# Altium PCB Power_Box_V2.PcbDoc (part 2 of 3)
Units mm, origin at the board's own origin, x right, y up, seen from the top; angles counter-clockwise.
Board outline 100 x 80 mm, 4 copper layers (Top Layer, Mid-Top, Mid-Bottom, Bottom Layer), stack 0.603 mm thick; 240 components, 204 nets, 825 pads, 313 vias.
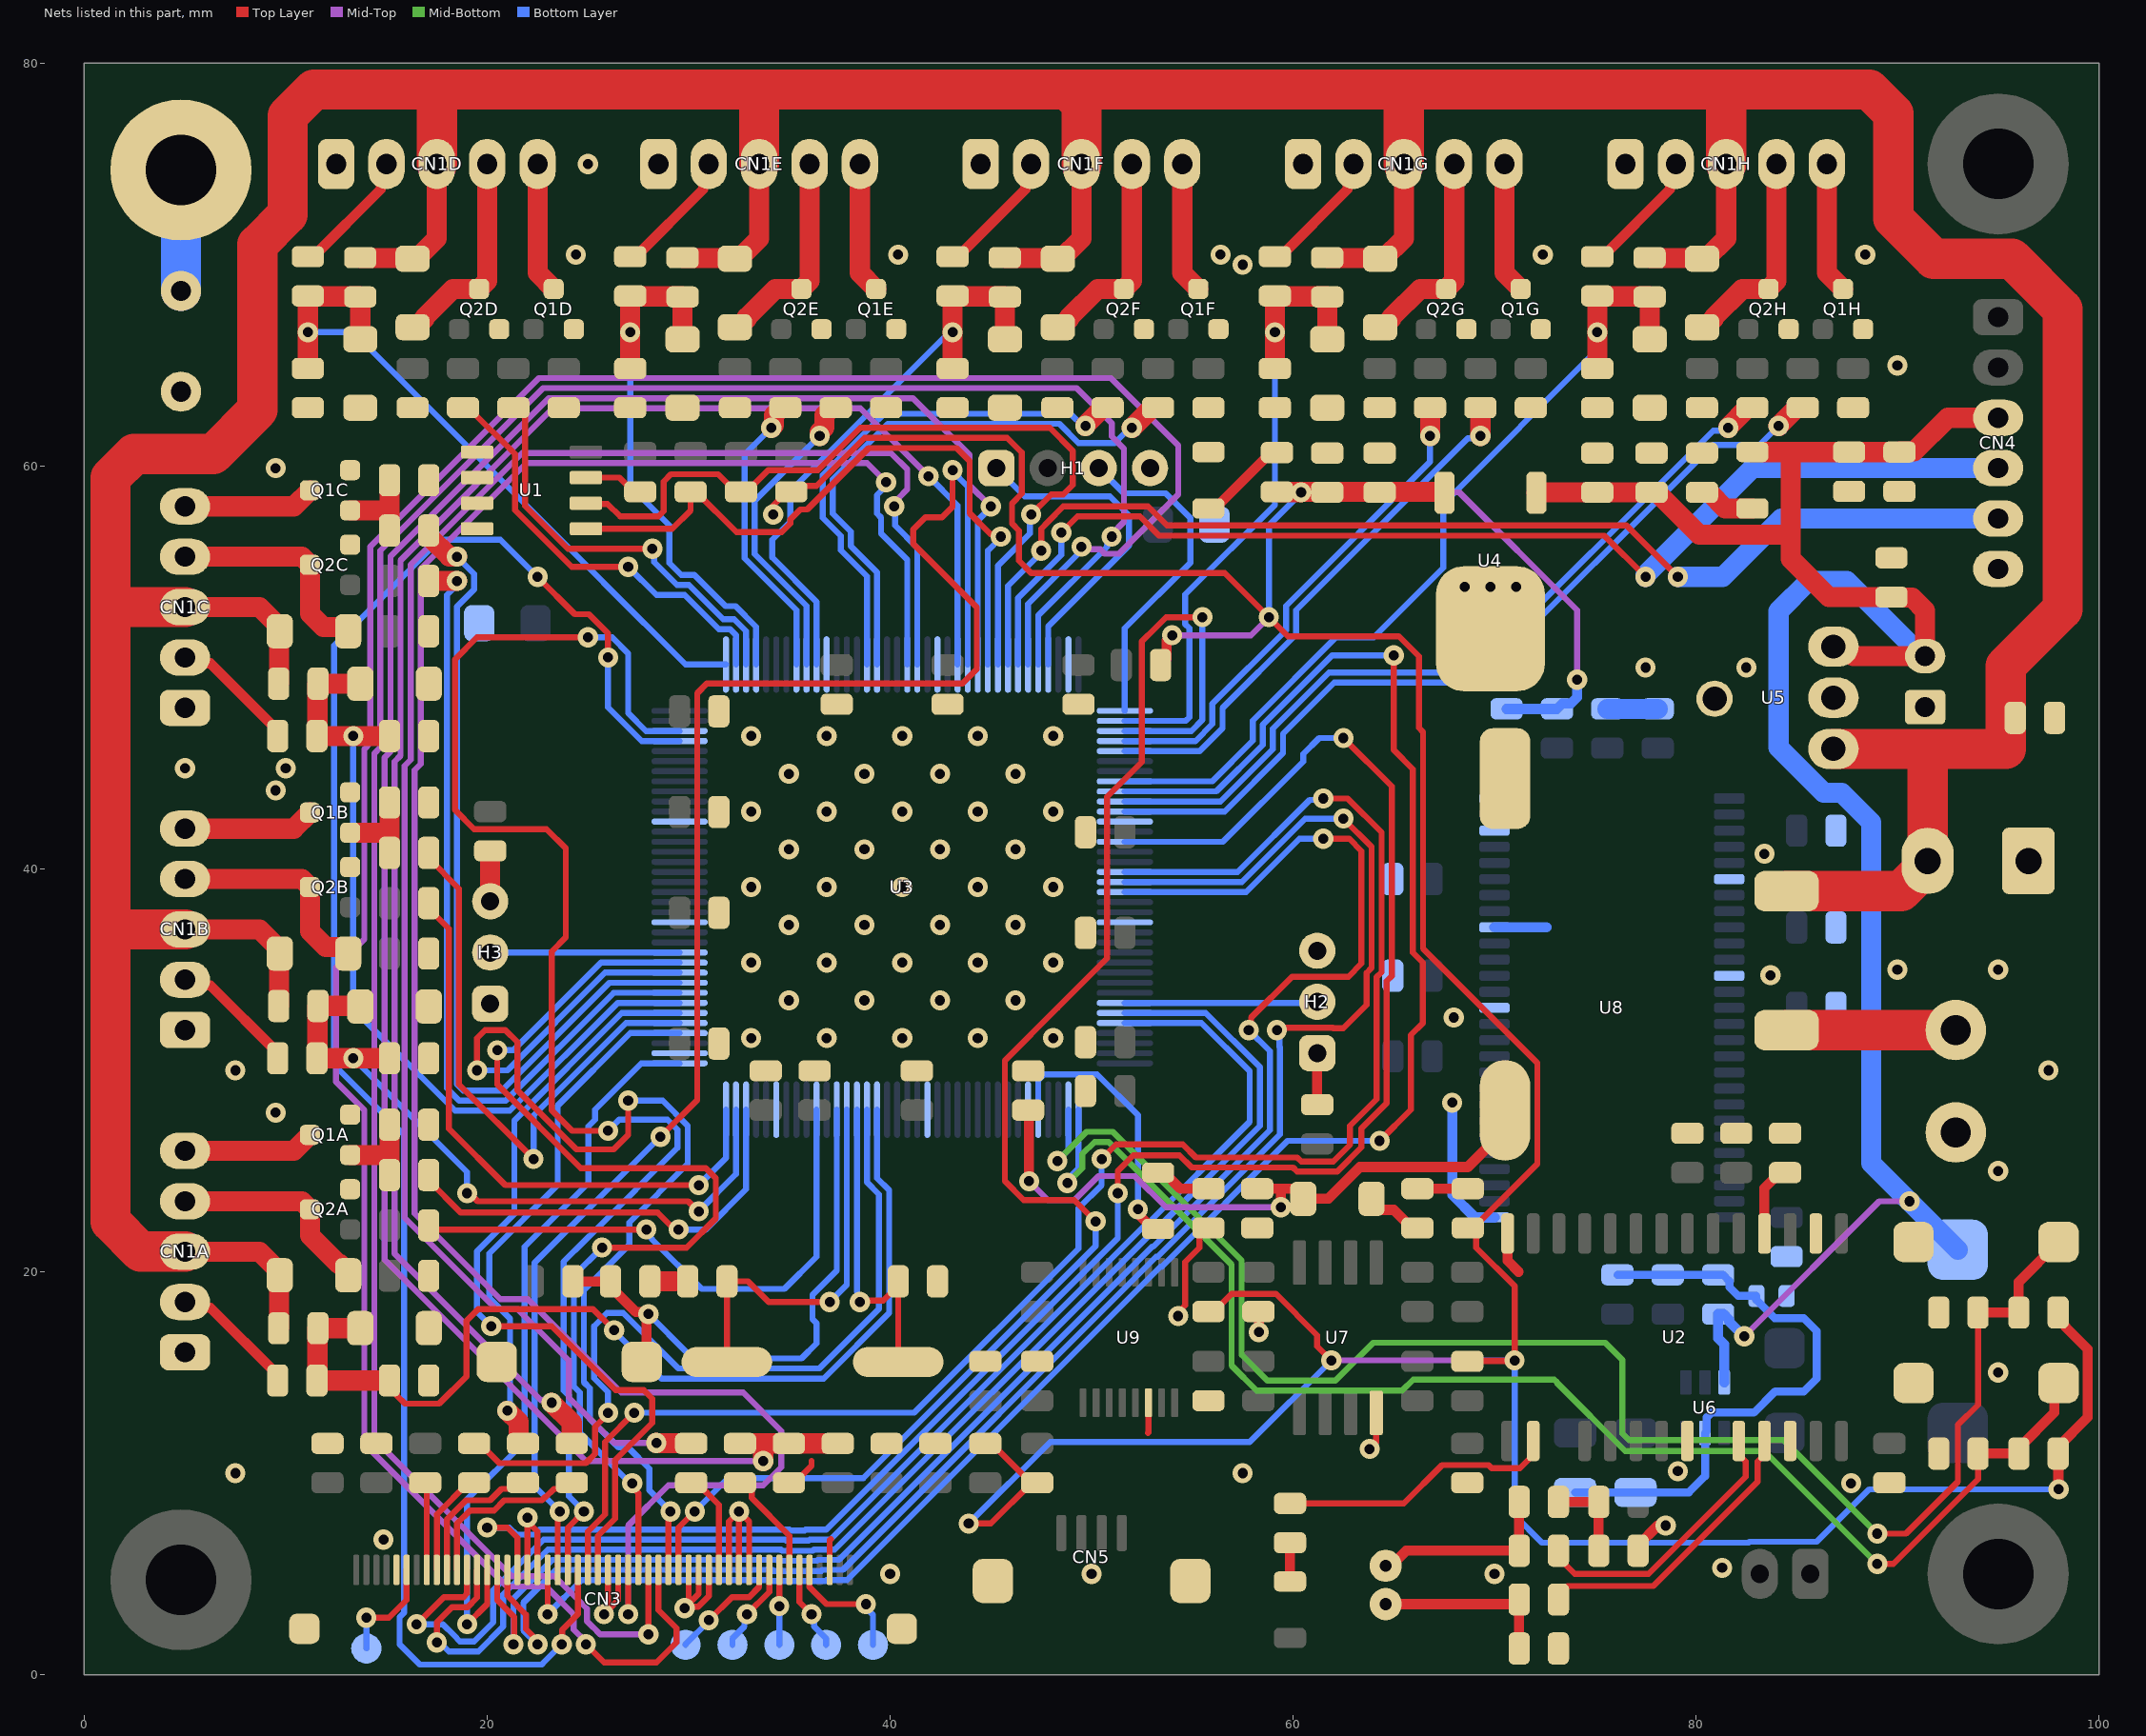
[diagram p4: the nets of this part, all layers, seen from the top]

## Part data
BAT1: library part "BATTERY HOLDER", "BATTERY", Voltage=3V, ComponentLink1Description=Linkedin, ComponentLink1URL=https://ir.linkedin.com/in/mahdi-bagherzade, Phone Number="0915 8700 314", Published Date=9-15-2024, Publisher="Mahdi Bagherzadeh", Size=2016, Type=SMD
C1A C1B C2A C2B C2C C2D C2E C2F C2G C2H C3 C4 C5 C6 C7 C8 C9 C10 C11 C12 C13 C14 C15 C16 C17 C18 C19 C20 C21 C22 C23 C24 C25 C26 C27 C28 C29 C30 C31 C33 C34 C35 C36 C38 C39 C41 C42 C45 C46 C50 C51 C52 C53 C54 C55 C56 C57 C58 C59 C60 C61: library part CAP-CER, "CAPACITOR", Tolerance=X7R, Voltage=50V, ComponentLink1Description=Linkedin, ComponentLink1URL=https://ir.linkedin.com/in/mahdi-bagherzade, Phone Number="0915 8700 314", Published Date=9-15-2024, Publisher="Mahdi Bagherzadeh", Type=SMD
C32 C37: library part CAP-TAN, "CAPACITOR", Power=-, Voltage=16V, ComponentLink1Description=Linkedin, ComponentLink1URL=https://ir.linkedin.com/in/mahdi-bagherzade, Phone Number="0915 8700 314", Published Date=9-15-2024, Publisher="Mahdi Bagherzadeh", Size=A, Tolerance=-
C40: library part CAP-CER, "CAPACITOR", Tolerance=X7R, Voltage=1KV, ComponentLink1Description=Linkedin, ComponentLink1URL=https://ir.linkedin.com/in/mahdi-bagherzade, Phone Number="0915 8700 314", Published Date=9-15-2024, Publisher="Mahdi Bagherzadeh", Type=THD
C43: library part CAP-ELEC, "CAPACITOR", Voltage=25V, ComponentLink1Description=Linkedin, ComponentLink1URL=https://ir.linkedin.com/in/mahdi-bagherzade, Phone Number="0915 8700 314", Published Date=9-15-2024, Publisher="Mahdi Bagherzadeh", Size=10x25, Type=THD
C44: library part CAP-ELEC, "CAPACITOR", Voltage=10V, ComponentLink1Description=Linkedin, ComponentLink1URL=https://ir.linkedin.com/in/mahdi-bagherzade, Phone Number="0915 8700 314", Published Date=9-15-2024, Publisher="Mahdi Bagherzadeh", Size=5x7mm, Type=THD
C47: library part CAP-CER, "CAPACITOR", Tolerance=X7R, Voltage=16V, ComponentLink1Description=Linkedin, ComponentLink1URL=https://ir.linkedin.com/in/mahdi-bagherzade, Phone Number="0915 8700 314", Published Date=9-15-2024, Publisher="Mahdi Bagherzadeh", Type=SMD
C48 C49: library part CAP-CER, "CAPACITOR", Tolerance=X7R, Voltage=25V, ComponentLink1Description=Linkedin, ComponentLink1URL=https://ir.linkedin.com/in/mahdi-bagherzade, Phone Number="0915 8700 314", Published Date=9-15-2024, Publisher="Mahdi Bagherzadeh", Type=SMD
CN1A CN1B CN1C CN1D CN1E CN1F CN1G CN1H: library part CN-5pin, "CONNECTOR", ComponentLink1Description=Linkedin, ComponentLink1URL=https://ir.linkedin.com/in/mahdi-bagherzade, Phone Number="0915 8700 314", Published Date=9-15-2024, Publisher="Mahdi Bagherzadeh", Size=2.54mm, Type=Straight-THD
CN2: library part CN-2pin, "CONNECTOR", ComponentLink1Description=Linkedin, ComponentLink1URL=https://ir.linkedin.com/in/mahdi-bagherzade, Phone Number="0915 8700 314", Published Date=9-15-2024, Publisher="Mahdi Bagherzadeh", Size=2.54mm, Type=Straight-THD
CN3: library part CN-FPC-50pin, "CONNECTOR", ComponentLink1Description=Linkedin, ComponentLink1URL=https://ir.linkedin.com/in/mahdi-bagherzade, Phone Number="0915 8700 314", Published Date=9-15-2024, Publisher="Mahdi Bagherzadeh", Size="?mm-50 Pin", Type=Straight/Right
CN4: library part CN-6pin, "CONNECTOR", ComponentLink1Description=Linkedin, ComponentLink1URL=https://ir.linkedin.com/in/mahdi-bagherzade, Phone Number="0915 8700 314", Published Date=9-15-2024, Publisher="Mahdi Bagherzadeh", Size=2.54mm, Type=Straight-THD
CN5: library part CN-FPC-4pin, "CONNECTOR", ComponentLink1Description=Linkedin, ComponentLink1URL=https://ir.linkedin.com/in/mahdi-bagherzade, Phone Number="0915 8700 314", Published Date=9-15-2024, Publisher="Mahdi Bagherzadeh", Size="?mm-4 Pin", Type=Straight/Right
D1A D1B D1C D1D D1E D1F D1G D1H D2 D3: library part DIODE, "DIODE", ComponentLink1Description=Linkedin, ComponentLink1URL=https://ir.linkedin.com/in/mahdi-bagherzade, Phone Number="0915 8700 314", Published Date=9-15-2024, Publisher="Mahdi Bagherzadeh", Type=SMD
  D1A D1B D1C D1D D1E D1F D1G D1H D2: Code=1N4148
  D3: Code=1N5408
D4: library part DIODE-SCHOTTKY, "DIODE", Code=SS34, ComponentLink1Description=Linkedin, ComponentLink1URL=https://ir.linkedin.com/in/mahdi-bagherzade, Phone Number="0915 8700 314", Published Date=9-15-2024, Publisher="Mahdi Bagherzadeh", Type=SMD
FB1 FB2 FB3 FB5 FB6 FB7 FB8 FB9: library part "FERRITE BEAD", "INDUCATOR", ComponentLink1Description=Linkedin, ComponentLink1URL=https://ir.linkedin.com/in/mahdi-bagherzade, Phone Number="0915 8700 314", Published Date=9-15-2024, Publisher="Mahdi Bagherzadeh", Type=SMD
FB4: "INDUCATOR", ComponentLink1Description=Linkedin, ComponentLink1URL=https://ir.linkedin.com/in/mahdi-bagherzade, Phone Number="0915 8700 314", Published Date=9-15-2024, Publisher="Mahdi Bagherzadeh"
H1: library part HEADER-4pin, "HEADER", ComponentLink1Description=Linkedin, ComponentLink1URL=https://ir.linkedin.com/in/mahdi-bagherzade, Phone Number="0915 8700 314", Published Date=9-15-2024, Publisher="Mahdi Bagherzadeh", Size=2.54mm, Type=Straight-Male
H2 H3: library part HEADER-3pin, "HEADER", ComponentLink1Description=Linkedin, ComponentLink1URL=https://ir.linkedin.com/in/mahdi-bagherzade, Phone Number="0915 8700 314", Published Date=9-15-2024, Publisher="Mahdi Bagherzadeh", Size=2.54mm, Type=Straight/Right-Male/Female
L1: library part INDUCATOR, "INDUCATOR", ComponentLink1Description=Linkedin, ComponentLink1URL=https://ir.linkedin.com/in/mahdi-bagherzade, Phone Number="0915 8700 314", Published Date=9-15-2024, Publisher="Mahdi Bagherzadeh", Size=10x10mm, Type=SMD
LED1 LED3 LED4: library part LED, "LED", Color=GREEN, ComponentLink1Description=Linkedin, ComponentLink1URL=https://ir.linkedin.com/in/mahdi-bagherzade, Phone Number="0915 8700 314", Published Date=9-15-2024, Publisher="Mahdi Bagherzadeh", Size=1206, Type=SMD
LED2: library part LED, "LED", Color=RED, ComponentLink1Description=Linkedin, ComponentLink1URL=https://ir.linkedin.com/in/mahdi-bagherzade, Phone Number="0915 8700 314", Published Date=9-15-2024, Publisher="Mahdi Bagherzadeh", Size=1206, Type=SMD
MIC1: library part MIC, "MIC", ComponentLink1Description=Linkedin, ComponentLink1URL=https://ir.linkedin.com/in/mahdi-bagherzade, Phone Number="0915 8700 314", Published Date=9-15-2024, Publisher="Mahdi Bagherzadeh", Size=2.2mm, Type=THD
Q1A Q1B Q1C Q1D Q1E Q1F Q1G Q1H: library part 2N2222, "TRANSISTOR", Code=1P, ComponentLink1Description=Linkedin, ComponentLink1URL=https://ir.linkedin.com/in/mahdi-bagherzade, Phone Number="0915 8700 314", Published Date=9-15-2024, Publisher="Mahdi Bagherzadeh", Type=SMD
Q2A Q2B Q2C Q2D Q2E Q2F Q2G Q2H: library part S8050, "TRANSISTOR", Code=J3Y, ComponentLink1Description=Linkedin, ComponentLink1URL=https://ir.linkedin.com/in/mahdi-bagherzade, Phone Number="0915 8700 314", Published Date=9-15-2024, Publisher="Mahdi Bagherzadeh", Type=SMD
R1A R1B R2A R2B R2C R2D R2E R2F R2G R2H R3A R3B R3C R3D R3E R3F R3G R3H R4A R4B R4C R4D R4E R4F R4G R4H R5A R5B R5C R5D R5E R5F R5G R5H R6A R6B R6C R6D R6E R6F R6G R6H R7A R7B R7C R7D R7E R7F R7G R7H R8 R9 R10 R11 R12 R13 R14 R15 R16 R17 R18 R43 R44 R45 R46 R47 R48 R49 R50 R51 R52 R53 R54 R55 R56 R57 R58 R59 R60 R61: library part RES, "RESISTOR", Power=1/8W, Tolerance=5%, ComponentLink1Description=Linkedin, ComponentLink1URL=https://ir.linkedin.com/in/mahdi-bagherzade, Phone Number="0915 8700 314", Published Date=9-15-2024, Publisher="Mahdi Bagherzadeh", Type=SMD
S1A S1B S2: library part "PUSH BUTTON", "SWITCH", ComponentLink1Description=Linkedin, ComponentLink1URL=https://ir.linkedin.com/in/mahdi-bagherzade, Phone Number="0915 8700 314", Published Date=9-15-2024, Publisher="Mahdi Bagherzadeh", Size=3x6mm, Type=2Pin-SMD
SC1 SC2 SC3 SC4: library part SCREW, "SCREW", ComponentLink1Description=Linkedin, ComponentLink1URL=https://ir.linkedin.com/in/mahdi-bagherzade, Phone Number="0915 8700 314", Published Date=9-15-2024, Publisher="Mahdi Bagherzadeh", Size=3mm
TP1 TP2 TP3 TP4 TP5 TP6: library part "TEST PIONT", ComponentLink1Description=Linkedin, ComponentLink1URL=https://ir.linkedin.com/in/mahdi-bagherzade, Phone Number="0915 8700 314", Published Date=9-15-2024, Publisher="Mahdi Bagherzadeh"
TR1: library part TEMINAL-2pin, "TERMINAL", Code=KF301-2Pin, ComponentLink1Description=Linkedin, ComponentLink1URL=https://ir.linkedin.com/in/mahdi-bagherzade, Phone Number="0915 8700 314", Published Date=9-15-2024, Publisher="Mahdi Bagherzadeh", Size=5.08mm, Type=Straight
U1: library part AT24C04, "IC", Code=AT24C04, ComponentLink1Description=Linkedin, ComponentLink1URL=https://ir.linkedin.com/in/mahdi-bagherzade, Phone Number="0915 8700 314", Published Date=9-15-2024, Publisher="Mahdi Bagherzadeh", Type=SMD
U2: library part ISD1730, "IC", Code=ISD1730, ComponentLink1Description=Linkedin, ComponentLink1URL=https://ir.linkedin.com/in/mahdi-bagherzade, Phone Number="0915 8700 314", Published Date=9-15-2024, Publisher="Mahdi Bagherzadeh", Type=SMD
U3: "ARM Cortex-M4 32-bit MCU+FPU, 225 DMIPS, 1024 kB Flash, 256 kB Internal RAM, 114 I/Os, 144-pin LQFP, -40 to 85 degC, Tray", I/Os (High Current)=114, Manufacturer=STMicroelectronics, Operating Frequency(F) (Processor speed) (MHz)=180, Supplier Part Number 1=STM32F429ZGT6-ND, Supply Voltage(Vcc) max (V)=3.6, Supply Voltage(Vcc) min (V)=1.8, ComponentLink1Description="Manufacturer URL", ComponentLink1URL=http://www.st.com/web/en/home.html, ComponentLink2Description=Datasheet, ComponentLink2URL=http://www.st.com/st-web-ui/static/active/en/resource/technical/document/data_brief/DM00053488.pdf, ComponentLink3Description="Package Specification", ComponentLink3URL=http://www.st.com/st-web-ui/static/active/en/resource/technical/document/datasheet/DM00037051.pdf, Core="ARM Cortex-M4", D/A Converter=2x12-bit, DatasheetVersion="Rev. 2", FLASH Size (Prog) (kB)=1024, Internal RAM Size (kB)=256, Mounting Technology="Surface Mount", PackageDescription="144-Pin Low Profile Quad Flat Package, 20 x 20 mm Body, 0.5 mm Pitch", PackageReference=LQFP144, PackageVersion="Rev. 4, 06/2013", Packing=Tray, PartNumber=STM32F429ZGT6, Supplier 1=Digi-Key, Supplier 2=Newark, Supplier 3=Mouser, Supplier Part Number 2=06X3675, Supplier Part Number 3=511-STM32F429ZGT6
U4: library part LF33, "REGULATOR", Voltage=3.3V, Code=LF33, ComponentLink1Description=Linkedin, ComponentLink1URL=https://ir.linkedin.com/in/mahdi-bagherzade, Phone Number="0915 8700 314", Published Date=9-15-2024, Publisher="Mahdi Bagherzadeh", Type=SMD
U5: library part 78Mxx, "REGULATOR", Voltage=5V, Code=7805, ComponentLink1Description=Linkedin, ComponentLink1URL=https://ir.linkedin.com/in/mahdi-bagherzade, Phone Number="0915 8700 314", Published Date=9-15-2024, Publisher="Mahdi Bagherzadeh", Type=THD
U6: library part MP3202, "IC", Code=MP3202, Phone Number="0915 8700 314", Published Date=7-2-2026, Publisher="Mahdi Bagherzadeh", Type=SMD
U7: library part W25Qxx, "IC", Code=W25Qxx, ComponentLink1Description=Linkedin, ComponentLink1URL=https://ir.linkedin.com/in/mahdi-bagherzade, Phone Number="0915 8700 314", Published Date=9-15-2024, Publisher="Mahdi Bagherzadeh", Type=SMD
U8: library part IS42S16400J-7TLI, "IC", Code=IS42S16400J-7TLI, ComponentLink1Description=Linkedin, ComponentLink1URL=https://ir.linkedin.com/in/mahdi-bagherzade, Phone Number="0915 8700 314", Published Date=9-15-2024, Publisher="Mahdi Bagherzadeh", Type=SMD
U9: library part XPT2046, "IC", Code=XPT2046, ComponentLink1Description=Linkedin, ComponentLink1URL=https://ir.linkedin.com/in/mahdi-bagherzade, Phone Number="0915 8700 314", Published Date=9-15-2024, Publisher="Mahdi Bagherzadeh", Type=SMD
Y1: library part CRYSTAL, "CRYSTAL", ComponentLink1Description=Linkedin, ComponentLink1URL=https://ir.linkedin.com/in/mahdi-bagherzade, Phone Number="0915 8700 314", Published Date=9-15-2024, Publisher="Mahdi Bagherzadeh", Type=SMD
ZD1A ZD1B ZD1C ZD1D ZD1E ZD1F ZD1G ZD1H: library part DIODE-ZENER, "DIODE", Power=Minimelf, Voltage=3.3V, ComponentLink1Description=Linkedin, ComponentLink1URL=https://ir.linkedin.com/in/mahdi-bagherzade, Phone Number="0915 8700 314", Published Date=9-15-2024, Publisher="Mahdi Bagherzadeh", Type=SMD
NT1: ComponentLink1Description=Linkedin, ComponentLink1URL=https://ir.linkedin.com/in/mahdi-bagherzade, Phone Number="0915 8700 314", Published Date=9-15-2024, Publisher="Mahdi Bagherzadeh"

## Via types
v1: diameter 1, hole 0.5, Top Layer to Bottom Layer, 226 vias
v2: diameter 1, hole 0.5, Top Layer to Bottom Layer, tented top, 87 vias

## Nets (pads, with @x,y where several pads share a name; then routed paths per layer and width w, separated by ;. In a path a pad name is that pad's centre, name@x,y a point inside that pad or via, vN(x,y) a via of type N, cw(c..) or ccw(c..) an arc to the next point about the centre after c; other vN are vias at no path point)
+3V3: C35.2 C36.2 FB1.2 FB2.1 FB3.1 FB4.1 FB5.1 FB6.1 FB7.1 FB8.1 FB9.1 R1A.1 R1B.1 R49.1 U4.3 | length 222.9
  Top Layer w0.3: v2(34.2,57.6) 34.2,58.044 34.881,58.725 FB1.2@35.095,58.725 35.386,59.016 36.345,59.016 38.729,61.4 45.811,61.4 46.53,60.681 46.53,58.632 46.05,58.152 46.05,57.152 46.4,56.802 46.4,55.3 47,54.7 56.6,54.7 59.75,51.55 65.25,51.55 65.35,51.45 65.352,51.45 66.25,50.552 66.25,47.011 66.45,46.811 66.45,36.05 72.125,30.375 72.125,25.35 68.95,22.175 FB5.1@68.726,22.175 ; v2(43.9,7.5) 45,7.5 FB9.1@47.025,9.525 ; FB3.1@44.725,11.475 45.038,11.475 46.988,9.525 FB9.1@47.025,9.525 ; FB9.1@47.3,9.525 FB9.1@47.025,9.525 ; FB6.1@55.802,18.025 56.077,18.025 56.951,18.9 59.152,18.9 61.2,16.852 61.2,16.3 v1(61.9,15.6) ; FB2.1@68.65,15.55 68.675,15.575 70.975,15.575 v2(71,15.6) 71,19.292 69.092,21.2 69.092,21.809 FB5.1@68.726,22.175 ; FB5.1@68.675,22.175 FB5.1@68.726,22.175
  Top Layer w0.5: FB4.1@53.425,50.125 53.731,50.431 53.731,51.331 v2(54,51.6) ; R1B.1@97.975,17.975 97.975,17.64 98.35,17.265 98.35,17.25 99.45,16.15 99.45,12.775 97.975,11.3 R1A.1@97.975,10.975 97.987,10.963 97.987,9.213 v1(98,9.2)
  Top Layer w1: R49.1@59.2,58.725 59.213,58.712 60.388,58.712 v2(60.4,58.7) ; v2@60.375,58.725 67.465,58.725 U4.3@67.515,58.675
  Mid-Top w0.3: v2(54,51.6) 57.9,51.6 v1(58.8,52.5) ; v2(60.4,58.7) 68.25,58.7 74.1,52.85 v1(74.1,49.4) ; v1(61.9,15.6) v2(71,15.6)
  Bottom Layer w0.3: v2(43.9,7.5) 47.95,11.55 57.85,11.55 v1(61.9,15.6) ; v1(58.8,52.5) 58.8,57.068 60.4,58.668 v2(60.4,58.7) ; v2(71,15.6) 71,7.9 72.35,6.55 82.607,6.55 82.657,6.6 86.002,6.6 88.602,9.2 v1(98,9.2)
  Bottom Layer w0.5: FB8.1@70.609,47.941 FB7.1@73.091,47.941 ; FB7.1@73.1,47.95 73.367,48.217 73.799,48.217 74.1,48.518 v1(74.1,49.4)
+5: C33.2 C34.2 C41.1 C42.1 C44.1 C46.1 C47.1 CN4.3 L1.1 LED4.1 U4.1 U5.3 U6.6 | length 108.3
  Top Layer w1: U4.1@72.085,58.675 72.11,58.7 C34.2@75.103,58.7 C33.2@77.795,58.7 78.07,58.7 80.17,56.6 84.7,56.6 ; LED4.1@82.798,60.7 84.7,60.7 ; U5.3@86.825,51.04 87.346,51.04 87.816,50.57 C44.1@91.375,50.57 91.375,52.825 90.725,53.475 89.725,53.475 C46.1@89.7,53.5 86.6,53.5 84.7,55.4 84.7,56.6 ; C41.1@90.1,60.7 90.125,60.725 90.825,60.725 92.5,62.4 CN4.3@95,62.4 ; C41.1@90.314,60.7 C42.1@87.6,60.7 84.7,60.7 ; 84.7,56.6 84.7,60.7
  Mid-Top w0.3: v1(82.4,16.8) 89.1,23.5 v1(90.6,23.5)
  Bottom Layer w0.5: U6.6@81.4,14.51 81.4,16.4 81.1,16.7 C47.1@81.1,17.9 81.368,17.9 81.642,17.626 81.642,17.526 82.368,16.8 v1(82.4,16.8)
  Bottom Layer w1: C44.1@91.375,50.57 91.225,50.57 87.495,54.3 85.6,54.3 84.1,52.8 84.1,46.031 86.347,43.784 87.228,43.784 88.7,42.311 88.7,25.393 L1.1@93,21.093
+12: C43.1 C45.1 CN1A.3 CN1B.3 CN1C.3 CN1D.3 CN1E.3 CN1F.3 CN1G.3 CN1H.3 D1A.2 D1B.2 D1C.2 D1D.2 D1E.2 D1F.2 D1G.2 D1H.2 D3.2 R6A.1 R6B.1 R6C.1 R6D.1 R6E.1 R6F.1 R6G.1 R6H.1 U5.1 | length 295.8
  Top Layer w1: CN1A.3@5,21 8.7,21 9.7,20 9.7,19.8 9.675,19.775 9.675,17.223 R6A.1@9.65,17.198 ; CN1B.3@5,37 8.7,37 9.7,36 D1B.2@9.7,35.8 9.675,35.775 9.675,33.223 R6B.1@9.65,33.198 ; CN1C.3@5,53 8.7,53 9.7,52 D1C.2@9.7,51.8 9.675,51.775 9.675,49.223 R6C.1@9.65,49.198 ; R6D.1@13.698,70.35 13.723,70.325 16.275,70.325 D1D.2@16.3,70.3 16.5,70.3 17.5,71.3 CN1D.3@17.5,75 ; R6E.1@29.699,70.35 29.723,70.325 32.275,70.325 D1E.2@32.3,70.3 32.5,70.3 33.5,71.3 CN1E.3@33.5,75 ; R6F.1@45.698,70.35 45.723,70.325 48.275,70.325 48.3,70.3 48.5,70.3 49.5,71.3 CN1F.3@49.5,75 ; R6G.1@61.698,70.35 61.723,70.325 64.275,70.325 64.3,70.3 64.5,70.3 65.5,71.3 CN1G.3@65.5,75 ; R6H.1@77.698,70.35 77.723,70.325 80.275,70.325 D1H.2@80.3,70.3 80.5,70.3 81.5,71.3 CN1H.3@81.5,75
  Top Layer w2: CN1A.3@5,21 2.8,21 1.3,22.5 1.3,37.1 ; CN1B.3@5,37 1.4,37 1.3,37.1 ; CN1C.3@5,53 1.4,53 1.3,53.1 ; CN1D.3@17.5,75 17.5,78.7 ; CN1E.3@33.5,75 33.5,78.6 33.6,78.7 ; CN1F.3@49.5,75 49.5,78 48.8,78.7 ; CN1G.3@65.5,75 65.5,78.7 ; CN1H.3@81.5,75 81.5,78.7 ; D3.2@84.5,38.9 90.188,38.9 91.5,40.212 C43.1@91.5,40.588 ; U5.1@86.825,45.96 95.375,45.96 ; C43.1@91.5,40.4 91.5,45.76 ; 95.375,46.16 95.375,47.5 95.375,50.075 98.2,52.9 98.2,67.783 95.683,70.3 91.8,70.3 89.8,72.3 89.8,77.5 88.6,78.7 81.5,78.7 ; 1.3,37.1 1.3,53.1 ; 1.3,53.1 1.3,59.428 2.472,60.6 6.4,60.6 8.6,62.8 8.6,71 10.1,72.5 10.1,77.4 11.4,78.7 17.5,78.7 ; 17.5,78.7 33.6,78.7 ; 33.6,78.7 48.8,78.7 ; 48.8,78.7 65.5,78.7 ; 65.5,78.7 81.5,78.7
+12_IN: D3.1 TR1.2 | length 8.4
  Top Layer w2: D3.1@84.5,32 TR1.2@92.9,32
GND: C47.2 C48.2 NT1.1 R53.2 R54.2 R55.2 U6.2 | length 29.7
  Bottom Layer w0.4: R54.2@74,9.05 R55.2@77,9.05 79.65,9.05 80.45,9.85 U6.2@80.45,12 80.54,12.09 80.54,12.771 80.774,13.005 82.88,13.005 83.937,14.062 85.362,14.062 86,14.7 86,17.05 85.35,17.7 83.9,17.7 83,18.6 NT1.1@83,18.8 82.1,18.8 81.661,19.239 81.661,19.53 81.341,19.85 C47.2@81.1,19.85 C48.2@78.6,19.85 R53.2@76.1,19.85
GND_MCU: BAT1.2 C1A.2 C1B.2 C2A.2 C2B.2 C2C.2 C2D.2 C2E.2 C2F.2 C2G.2 C2H.2 C3.2 C4.2 C7.2 C8.2 C9.2 C10.2 C11.1 C12.2 C13.2 C14.2 C15.1 C16.1 C17.1 C18.2 C19.2 C20.2 C21.2 C22.2 C23.2 C24.2 C25.2 C26.2 C27.2 C28.2 C29.2 C30.2 C31.2 C32.2 C33.1 C34.1 C35.1 C36.1 C37.2 C38.1 C39.1 C40.2 C41.2 C42.2 C43.2 C44.2 C45.2 C46.2 C49.2 C50.1 C51.1 C52.1 C53.1 C54.1 C55.1 C56.1 C57.1 C58.1 C59.2 C60.2 C61.2 CN1A.1 CN1B.1 CN1C.1 CN1D.1 CN1E.1 CN1F.1 CN1G.1 CN1H.1 CN3.5 CN3.18 CN3.19 CN3.26 CN3.27 CN3.34 CN3.35 CN3.36 CN3.38 CN3.39 CN3.40 CN3.48 CN3.51 CN3.52 CN4.6 CN5.5 CN5.6 H1.4 H2.3 H3.1 LED2.2 NT1.2 Q1A.1 Q1B.1 Q1C.1 Q1D.1 Q1E.1 Q1F.1 Q1G.1 Q1H.1 Q2A.1 Q2B.1 Q2C.1 Q2D.1 Q2E.1 Q2F.1 Q2G.1 Q2H.1 R3A.2 R3B.2 R3C.2 R3D.2 R3E.2 R3F.2 R3G.2 R3H.2 R5A.1 R5B.1 R5C.1 R5D.1 R5E.1 R5F.1 R5G.1 R5H.1 R13.2 R14.2 R51.2 R52.2 S1A.1 S1B.1 S2.1 TR1.1 U1.1 U1.2 U1.3 U1.4 U1.7 U2.8 U2.12 U2.16 U2.28 U3.16 U3.31 U3.38 U3.51 U3.61 U3.83 U3.94 U3.107 U3.120 U3.130 U4.2 U5.2 U5.4 U7.4 U8.6 U8.12 U8.28 U8.41 U8.46 U8.52 U8.54 U9.6 ZD1A.1 ZD1B.1 ZD1C.1 ZD1D.1 ZD1E.1 ZD1F.1 ZD1G.1 ZD1H.1 | length 59.3
  Top Layer w0.3: CN3.18@22,5.2 v1@22,7.511 ; v1(22,7.8) v1@22,7.511 ; CN3.19@22.5,5.2 22.5,7.111 22.1,7.511 v1@22,7.511 ; U1.7@24.9,59.43 26.557,59.43 27.261,58.725 C3.2@27.597,58.725 ; v1(25.8,3) v1@25.8,3.002 ; CN3.26@26,5.2 26,3.389 25.8,3.189 v1@25.8,3.002 ; CN3.27@26.5,5.2 26.5,3.702 v1@25.8,3.002 ; 29.3,19.525 C17.1@29.95,19.525 ; v1@29.934,3.305 30.002,3.373 30.471,3.373 31,3.902 CN3.36@31,5.2 ; v1@29.934,3.434 30.5,4 CN3.35@30.5,5.2 ; v1@30,3.6 CN3.34@30,5.2 ; CN3.38@32,5.2 32,7.6 v1(32.5,8.1) ; CN3.39@32.5,5.2 v1(32.5,8.1) ; CN3.40@33,5.2 33,7.6 v1(32.5,8.1) ; C11.1@34.975,9.525 35.25,9.525 36.1,10.375 36.1,10.6 ; CN3.48@37,5.2 37,6.675 37.05,6.725 ; 52.8,12 52.825,12.025 U9.6@52.825,13.5 ; v2(54.3,17.8) 54.3,17.976 54.65,18.326 54.65,20.489 55.361,21.2 55.361,21.809 55.727,22.175 R51.2@55.8,22.175 ; C50.1@58.28,18.025 C50.1@58.3,18.004 ; v2(63.8,11.2) 64.132,11.532 U7.4@64.132,12.998
  Top Layer w0.5: v2(58.3,17) C50.1@58.3,18.004 ; U2.28@70.65,21.9 70.65,20.55 71.2,20 ; C4.2@77.125,6.15 77.125,6.418 78.106,7.4 v2(78.5,7.4)
  Top Layer w1: C15.1@28.075,19.525 29.3,19.525
  Bottom Layer w0.5: v1(67.9,28.4) 67.9,23.825 69.031,22.694 69.994,22.694 U8.28@70,22.7 ; U8.46@70,37.1 72.575,37.1
  Bottom Layer w1: C58.1@75.6,47.95 C53.1@78.1,47.95
  other v1: 29.8,3.3 40,5 81.3,5.3 14.85,6.7 87.7,9.5 7.5,10 95,25 7.5,30 33.1,31.6 36.85,31.6 40.6,31.6 44.35,31.6 48.1,31.6 67.975,32.625 34.975,33.475 38.725,33.475 42.475,33.475 46.225,33.475 83.7,34.725 90,35 95,35 33.1,35.35 36.85,35.35 40.6,35.35 44.35,35.35 48.1,35.35 34.975,37.225 38.725,37.225 42.475,37.225 46.225,37.225 33.1,39.1 36.85,39.1 40.6,39.1 44.35,39.1 48.1,39.1 83.4,40.75 34.975,40.975 38.725,40.975 42.475,40.975 46.225,40.975 33.1,42.85 36.85,42.85 40.6,42.85 44.35,42.85 48.1,42.85 9.5,43.9 34.975,44.725 38.725,44.725 42.475,44.725 46.225,44.725 5,45 10,45 33.1,46.6 36.85,46.6 40.6,46.6 44.35,46.6 48.1,46.6 77.5,50 82.5,50 68.525,54 69.8,54 71.075,54 90,65 25,75
  other v2: 50,5 70,5 57.5,10 79.1,10.1 95,15 9.5,27.9 97.5,30 9.5,59.9 57.5,70 24.4,70.5 40.4,70.5 56.4,70.5 72.4,70.5 88.4,70.5
ISD_LED: R10.2 U2.2 | length 13.9
  Top Layer w0.3: R10.2@59.85,8.5 65.5,8.5 67.4,10.4 69.705,10.4 69.855,10.25 71.263,10.25 71.925,10.913 U2.2@71.925,11.6
ISD_MIC_N: C6.2 U2.11 | length 14.6
  Top Layer w0.3: C6.2@73.175,3.725 73.175,3.939 73.636,4.4 77.889,4.4 83.062,9.573 83.062,10.574 83.4,10.912 U2.11@83.4,11.6
ISD_MIC_P: C5.2 U2.10 | length 13.9
  Top Layer w0.3: C5.2@73.175,6.15 73.175,5.814 73.989,5 77.641,5 82.462,9.822 82.462,10.574 82.125,10.912 U2.10@82.125,11.6
LTDC_B2: CN3.17 U3.122 | length 92.6
  Top Layer w0.3: v2(20,7.3) 20.998,7.3 21.5,6.798 CN3.17@21.5,5.2 ; v2(51.3,23.9) 51.3,24.999 52.076,25.775 54.368,25.775 54.968,25.175 60.002,25.175 60.202,24.975 62.198,24.975 63.4,26.177 63.4,27.118 64.65,28.368 64.65,34.429 64.9,34.679 64.9,44.1 v1(62.5,46.5)
  Bottom Layer w0.3: v2(20,7.3) 21.096,7.3 21.446,6.95 22.352,6.95 22.602,7.2 34.998,7.2 35.048,7.15 35.752,7.15 35.802,7.2 36.83,7.2 51.3,21.67 v2(51.3,23.9) ; U3.122@51.65,41.35 56.521,41.35 60.5,45.329 60.5,45.702 61.298,46.5 v1(62.5,46.5)
LTDC_B3: CN3.16 U3.126 | length 86.2
  Top Layer w0.3: CN3.16@21,5.2 21,3.909 21.933,2.976 21.933,2.256 22.5,1.689 v2(22.5,1.5) ; v1(59.2,32) 59.31,32.11 61.981,32.11 61.991,32.1 62.5,32.1 63.65,33.25 63.65,34.843 63.9,35.093 63.9,41.1 v1(62.5,42.5)
  Bottom Layer w0.3: v2(22.5,1.5) v2(22.5,1.5) 21.8,2.202 21.8,3.57 23.43,5.2 34.17,5.2 34.22,5.15 36.58,5.15 36.63,5.2 37.659,5.2 53.209,20.75 53.273,20.75 59.35,26.827 59.35,31.157 59.334,31.173 59.334,31.866 v1(59.2,32) ; U3.126@51.65,39.35 57.457,39.35 60.607,42.5 v1(62.5,42.5)
LTDC_B4: CN3.15 U3.127 | length 84.9
  Top Layer w0.3: CN3.15@20.5,5.2 20.5,3.702 21.343,2.859 21.343,1.543 v1(21.3,1.5) ; v1(57.8,32) 57.922,32.122 57.922,32.622 59.95,34.65 62.75,34.65 63.4,35.3 63.4,40.893 62.793,41.5 v1(61.5,41.5)
  Bottom Layer w0.3: v1(21.3,1.5) 21.3,3.777 23.223,5.7 34.377,5.7 34.427,5.65 36.373,5.65 36.423,5.7 37.452,5.7 53.002,21.25 53.066,21.25 58.85,27.034 58.85,30.95 v1(57.8,32) ; U3.127@51.65,38.85 57.664,38.85 60.314,41.5 v1(61.5,41.5)
LTDC_B5: CN3.14 U3.37 | length 36.4
  Top Layer w0.3: v1(19,2.5) 20,3.5 CN3.14@20,5.2
  Bottom Layer w0.3: v1(19,2.5) 19,8.7 21.85,11.55 21.85,21.243 25.024,24.417 25.024,27.226 25.35,27.552 25.35,28.052 27.648,30.35 U3.37@29.55,30.35
LTDC_B6: CN3.13 U3.139 | length 68.4
  Top Layer w0.3: v2(17.5,1.6) 17.5,2.6 18.25,3.35 19.031,3.35 19.5,3.819 CN3.13@19.5,5.2
  Bottom Layer w0.3: v2(17.5,1.6) 17.644,1.6 18.094,1.15 19.559,1.15 20.8,2.391 20.8,3.984 23.016,6.2 34.584,6.2 34.634,6.15 36.166,6.15 36.216,6.2 37.245,6.2 52.795,21.75 52.859,21.75 58.35,27.241 58.35,30.164 55.664,32.85 U3.139@51.65,32.85
LTDC_B7: CN3.12 U3.140 | length 67.4
  Top Layer w0.3: v1(16.5,2.5) 17.85,3.85 18.824,3.85 19,4.026 CN3.12@19,5.2
  Bottom Layer w0.3: v1(16.5,2.5) 17.802,2.5 18.35,1.952 18.35,1.948 18.648,1.65 19.352,1.65 20.3,2.598 20.3,4.191 22.809,6.7 34.791,6.7 34.841,6.65 35.959,6.65 36.009,6.7 37.037,6.7 52.587,22.25 52.652,22.25 57.85,27.448 57.85,29.957 55.457,32.35 U3.140@51.65,32.35
LTDC_CLK: R43.1 U3.92 | length 90.2
  Top Layer w1: v2(28.4,11.5) 28.412,11.488 30.113,11.488 R43.1@30.125,11.475
  Mid-Top w0.3: v2(28.4,11.5) 26.298,11.5 24.05,13.748 24.05,15.6 21.502,18.148 20.441,18.148 15.9,22.689 15.9,45.12 16.2,45.42 16.2,55.109 21.741,60.65 40.043,60.65 40.85,59.843 40.85,58.852 40.65,58.652 40.65,58.639 40.2,58.189 v1(40.2,58)
  Bottom Layer w0.3: v1(40.2,58) 40.248,57.952 40.248,57.05 41.35,55.948 U3.92@41.35,50.15
LTDC_DE: R16.1 U3.22 | length 40.4
  Top Layer w0.3: R16.1@19.35,11.475 19.625,11.475 20.6,10.5 24.891,10.5 25.35,10.959 25.35,12.306 26,12.956 v1(26,13)
  Bottom Layer w0.3: v1(26,13) 26,14.023 25.3,14.723 25.3,17.302 25.948,17.95 26.748,17.95 29.498,15.2 36.493,15.2 39.45,18.157 39.45,23.843 38.85,24.443 U3.22@38.85,28.05
LTDC_G2: CN3.25 U3.42 | length 40.8
  Top Layer w0.3: v2(20.2,17.3) 23.2,17.3 26.375,14.125 27.775,14.125 28.198,13.702 28.198,12.5 26.35,10.652 26.35,7.741 25.5,6.891 CN3.25@25.5,5.2
  Bottom Layer w0.3: v2(20.2,17.3) 19.5,18 19.5,21.014 21.35,22.864 21.35,27.514 26.686,32.85 U3.42@29.55,32.85
LTDC_G3: CN3.24 U3.125 | length 83.5
  Top Layer w0.3: CN3.24@25,5.2 25,7.098 25.85,7.948 25.85,11.55 v1(27.3,13) ; v1(50.5,25.6) 51.225,26.325 54.525,26.325 55.175,25.675 60.209,25.675 60.409,25.475 61.991,25.475 62.825,26.309 62.825,27.25 64.15,28.575 64.15,34.636 64.4,34.886 64.4,41.802 62.702,43.5 v1(61.5,43.5)
  Bottom Layer w0.3: v1(27.3,13) 41.202,13 49.35,21.148 49.35,23.152 50.5,24.302 v1(50.5,25.6) ; U3.125@51.65,39.85 57.249,39.85 60.828,43.429 61.429,43.429 v1(61.5,43.5)
LTDC_G4: CN3.23 U3.69 | length 89.7
  Top Layer w0.3: v1(22.5,54.5) 24.35,52.65 25.052,52.65 26,51.702 v1(26,50.5) ; v1(23.7,1.5) 23.722,1.522 23.722,2.222 24.5,3 CN3.23@24.5,5.2
  Bottom Layer w0.3: v1(22.5,54.5) 20.65,56.35 17.65,56.35 12.4,51.1 12.4,30.275 15.875,26.8 15.875,3.077 15.65,2.852 15.65,1.5 16.65,0.5 22.7,0.5 22.85,0.65 22.852,0.65 23.7,1.498 v1(23.7,1.5) ; v1(26,50.5) 26,48.029 27.679,46.35 27.7,46.35 U3.69@29.55,46.35
LTDC_G5: CN3.22 U3.70 | length 74.4
  Top Layer w0.3: CN3.22@24,5.2 24,7.298 24.8,8.098 v1(24.8,8.1) ; v1(25,51.5) 19.5,51.5 18.4,50.4 18.4,42.934 19.359,41.975 22.95,41.975 23.9,41.025 23.9,36.6 23.2,35.9 23.2,28.014 24.214,27 v1(26,27)
  Bottom Layer w0.3: v1(24.8,8.1) 24.8,8.102 24.05,8.852 24.05,13.852 23.8,14.102 23.8,20.5 24.85,21.55 24.85,21.552 25.348,22.05 25.35,22.05 29.45,26.15 29.45,27.052 28.952,27.55 26.55,27.55 v1(26,27) ; v1(25,51.5) 26.202,51.5 27,50.702 27,47.736 27.886,46.85 U3.70@29.55,46.85
LTDC_G6: CN3.21 U3.97 | length 84.2
  Top Layer w0.3: CN3.21@23.5,5.2 23.5,8 v2(23.6,8.1) ; v1(28.6,26.7) 30.425,28.525 30.425,48.725 30.9,49.2 43.591,49.2 44.3,49.909 44.3,52.998 41.15,56.148 41.15,56.852 41.748,57.45 42.575,57.45 43.1,57.975 v1(43.1,59.8)
  Bottom Layer w0.3: v2(23.6,8.1) 22.35,9.35 22.35,20.45 v1(28.6,26.7) ; v1(43.1,59.8) 43.1,59.744 43.85,58.994 U3.97@43.85,50.15
LTDC_G7: CN3.20 U3.117 | length 95.6
  Top Layer w0.3: v1(23,3) CN3.20@23,5.2 ; v1(64.3,26.5) 65.85,28.05 65.85,31.753 66.44,32.343 66.44,35.353 65.95,35.843 65.95,44.959 65,45.909 v1(65,50.6)
  Bottom Layer w0.3: v1(23,3) 24.7,4.7 33.962,4.7 34.012,4.65 36.788,4.65 36.838,4.7 37.866,4.7 53.416,20.25 53.48,20.25 59.73,26.5 v1(64.3,26.5) ; U3.117@51.65,43.85 54.386,43.85 56.193,43.85 58.5,46.157 58.5,47.164 61.936,50.6 v1(65,50.6)
LTDC_HSYNC: R18.1 U3.96 | length 88.5
  Top Layer w1: v2(23.2,13.5) 24.2,12.5 R18.1@24.2,11.475
  Mid-Top w0.3: v2(23.2,13.5) 23.066,13.634 22.664,13.634 19.35,16.948 15.4,20.898 15.4,45.327 15.7,45.627 15.7,55.316 23.259,62.875 38.525,62.875 v1(41.9,59.5)
  Bottom Layer w0.3: v1(41.9,59.5) 43.35,58.05 U3.96@43.35,50.15
LTDC_R2: CN3.33 U3.111 | length 77.4
  Top Layer w0.3: CN3.33@29.5,5.2 29.5,7.298 30.3,8.098 v1(30.3,8.1) ; v1(50.2,22.5) 49.141,23.559 46.639,23.559 45.7,24.498 45.7,30.491 48.309,33.1 50.775,35.566 50.775,43.582 52.5,45.307 52.5,51.3 53.15,51.95 53.15,51.952 53.648,52.45 53.65,52.45 53.7,52.5 v1(55.5,52.5)
  Bottom Layer w0.3: v1(30.3,8.1) 31.95,9.75 38.673,9.75 50.2,21.277 v1(50.2,22.5) ; U3.111@51.65,46.85 54.95,46.85 55.5,47.4 v1(55.5,52.5)
LTDC_R3: CN3.32 U3.46 | length 56.9
  Top Layer w0.3: v2(19.5,30) 19.5,31.6 19.9,32 20.9,32 21.5,31.4 21.5,29.007 24.432,26.075 26.277,26.075 27,26.798 v1(27,28.5) ; CN3.32@29,5.2 29,8 v1(29.1,8.1)
  Bottom Layer w0.3: v2(19.5,30) 21.007,30 25.857,34.85 U3.46@29.55,34.85 ; v1(27,28.5) 28.709,28.5 29.95,27.259 29.95,25.352 27.05,22.452 27.05,21.348 24.8,19.098 24.8,14.516 25.1,14.216 25.1,12.698 26.523,11.275 27,11.275 28.05,10.225 28.05,9.15 v1(29.1,8.1)
LTDC_R4: CN3.31 U3.103 | length 131.2
  Top Layer w0.3: v2(24.9,1.5) 25.8,0.6 28.4,0.6 29.4,1.6 29.4,2.3 28.5,3.2 CN3.31@28.5,5.2
  Mid-Top w0.3: v2(24.9,1.5) 24.9,1.636 24.296,2.24 24.296,2.996 22.918,4.375 20.975,4.375 13.9,11.45 13.9,28.034 12.5,29.434 12.5,35.109 13.9,36.509 13.9,45.948 14.2,46.248 14.2,56.007 22.568,64.375 50.957,64.375 54.3,61.032 54.3,58.598 51.352,55.65 50.648,55.65 50.432,55.866 49.634,55.866 v1(49.5,56)
  Bottom Layer w0.3: U3.103@46.85,50.15 46.85,53.161 49.5,55.811 v1(49.5,56)
LTDC_R5: CN3.30 U3.104 | length 119.8
  Top Layer w0.3: v1(28,2) CN3.30@28,5.2
  Mid-Top w0.3: v1(28,2) 25.602,2 25.252,2.35 25.248,2.35 24.95,2.648 24.95,3.275 23.35,4.875 21.223,4.875 14.4,11.698 14.4,45.741 14.7,46.041 14.7,55.8 22.775,63.875 49.25,63.875 51,62.125 51,61.475 51.61,60.865 51.61,57.233 51,56.623 v1(51,56.5)
  Bottom Layer w0.3: U3.104@47.35,50.15 47.35,52.58 50.763,55.993 50.763,56.074 51,56.311 v1(51,56.5)
LTDC_R6: CN3.29 U3.47 | length 51.5
  Top Layer w0.3: v2(20.5,31) 20.5,29.3 24.65,25.15 30.852,25.15 31.35,24.652 31.35,22.648 29.902,21.2 v2(25.7,21.2) ; v1(27.2,9.5) 27.2,9.311 27.5,9.011 CN3.29@27.5,5.2
  Bottom Layer w0.3: v2(20.5,31) 21.3,31 25.65,35.35 U3.47@29.55,35.35 ; v2(25.7,21.2) 24.3,19.8 24.3,14.309 24.6,14.009 24.6,12.011 27.111,9.5 v1(27.2,9.5)
LTDC_R7: CN3.28 U3.91 | length 107.5
  Top Layer w0.3: v2(27,3) CN3.28@27,5.2
  Mid-Top w0.3: v2(27,3) 27,7.4 29,9.4 33.702,9.4 34.6,10.298 34.6,12.1 32.7,14 26.657,14 22.009,18.648 20.648,18.648 16.4,22.896 16.4,44.912 16.7,45.212 16.7,54.902 21.948,60.15 38.852,60.15 39.8,59.202 v2(39.8,59.2)
  Bottom Layer w0.3: v2(39.8,59.2) 39.8,59.011 39.35,58.561 39.35,57.648 39.55,57.448 39.55,56.65 40.85,55.35 U3.91@40.85,50.15
LTDC_RST: C11.2 R44.1 R45.1 U3.98 | length 108
  Top Layer w1: R45.1@32.55,11.475 33.7,11.475 ; v2(33.7,10.6) 33.7,11.475 ; C11.2@34.975,11.475 33.7,11.475 ; C11.2@34.975,11.475 R44.1@37.4,11.475
  Mid-Top w0.3: v2(33.7,10.6) 24.898,10.6 14.9,20.598 14.9,45.534 15.2,45.834 15.2,55.523 23.052,63.375 41.132,63.375 43.95,60.557 43.95,59.05 v2(45,58)
  Bottom Layer w0.3: U3.98@44.35,50.15 44.35,57.306 45,57.956 v2(45,58)
LTDC_VSYNC: R17.1 U3.40 | length 26.6
  Top Layer w1: v2(21,13.1) 21.554,12.546 21.554,11.5 21.579,11.475 R17.1@21.775,11.475
  Bottom Layer w0.3: v2(21,13.1) 21.134,13.234 21.134,17.666 20.1,18.7 20.1,20.907 23.5,24.307 23.5,28.25 27.1,31.85 U3.40@29.55,31.85
MCU_BOOT0: H2.2 U3.138 | length 9.6
  Bottom Layer w0.3: U3.138@51.65,33.35 61.15,33.35 H2.2@61.2,33.4
MCU_BOOT1: H3.2 U3.48 | length 9.4
  Bottom Layer w0.3: H3.2@20.15,35.85 U3.48@29.55,35.85
MCU_KEY1: C1A.1 R1A.2 S1A.2 U3.1 | length 71.8
  Top Layer w0.3: v2(89,5.5) 89.796,5.5 94,9.704 C1A.1@94,10.975
  Top Layer w0.5: C1A.1@94,10.975 R1A.2@96.025,10.975 96.025,11.25 97.793,13.018 97.793,14.268 S1A.2@98,14.475
  Mid-Bottom w0.3: v2(48.8,24.409) 49.541,25.15 49.541,25.843 50.148,26.45 50.852,26.45 56.95,20.352 56.95,15.343 58.193,14.1 65.411,14.1 65.961,14.65 72.972,14.65 73.099,14.523 73.099,14.492 76.491,11.1 83.4,11.1 v2(89,5.5)
  Bottom Layer w0.3: v2(48.8,24.409) 48.8,24.599 49.35,25.149 U3.1@49.35,28.05
MCU_KEY2: C1B.1 R1B.2 S1B.2 U3.2 | length 79
  Top Layer w0.3: v1(89,7) 89.001,7.001 90.426,7.001 93,9.575 93,12.4 94,13.4 C1B.1@94,17.975
  Top Layer w0.5: C1B.1@94,17.975 R1B.2@96.025,17.975 96.025,19.5 S1B.2@98,21.475
  Mid-Bottom w0.3: v1(48.3,25.5) 49.75,26.95 51.059,26.95 57.45,20.559 57.45,15.875 58.725,14.6 62.102,14.6 63.977,16.475 75.5,16.475 76.35,15.625 76.35,11.976 76.676,11.65 84.348,11.65 v1(89,7) v1(89,7)
  Bottom Layer w0.3: v1(48.3,25.5) 48.85,26.05 U3.2@48.85,28.05
MCU_LED1: R2A.2 U3.34 | length 21.8
  Top Layer w0.3: R2A.2@17.1,24.8 17.1,24.525 18.675,22.95 28.461,22.95 29.311,22.1 v1(29.5,22.1)
  Bottom Layer w0.3: v1(29.5,22.1) 30.85,22.1 32.85,24.1 U3.34@32.85,28.05
MCU_LED2: R2B.2 U3.41 | length 28.7
  Top Layer w0.3: R2B.2@17.1,40.8 17.1,40.525 18.6,39.025 18.6,29.3 v1(22.3,25.6)
  Bottom Layer w0.3: v1(22.3,25.6) 22.3,27.757 26.893,32.35 U3.41@29.55,32.35
MCU_LED3: R2C.2 U3.45 | length 42.4
  Top Layer w1: R2C.2@17.1,56.8 17.1,56.525 18.125,55.5 v2(18.5,55.5)
  Bottom Layer w0.3: v2(18.5,55.5) 18.502,55.5 19.35,54.652 19.35,53.875 18.5,53.025 18.5,29.314 18.814,29 20.714,29 26.064,34.35 U3.45@29.55,34.35
MCU_LED4: R2D.2 U3.75 | length 20.8
  Top Layer w0.3: R2D.2@21.3,62.9 21.514,62.9 21.881,62.534 21.881,58.019 24,55.9 v1(28.2,55.9)
  Bottom Layer w0.3: v1(28.2,55.9) 28.284,55.816 28.284,55.241 29.425,54.1 30.007,54.1 31.707,52.4 32.264,52.4 32.85,51.814 U3.75@32.85,50.15
MCU_LED5: R2E.2 U3.81 | length 15.6
  Top Layer w1: v1(36.5,61.5) 36.5,61.689 36.736,61.925 36.736,62.534 37.102,62.9 R2E.2@37.3,62.9
  Bottom Layer w0.3: U3.81@35.85,50.15 35.85,53.057 33.275,55.632 33.275,58.275 v1(36.5,61.5)
MCU_LED6: R2F.2 U3.88 | length 28.5
  Top Layer w1: v2(52,61.9) 52.013,61.9 53.013,62.9 R2F.2@53.3,62.9
  Bottom Layer w0.3: U3.88@39.35,50.15 39.35,54.729 38.05,56.029 38.05,56.748 37.15,57.648 37.15,59.352 39.898,62.1 48.398,62.1 49.348,61.15 51.15,61.15 51.9,61.9 v2(52,61.9)
MCU_LED7: R2G.2 U3.113 | length 26.8
  Top Layer w1: v2(69.3,61.5) R2G.2@69.3,62.9
  Bottom Layer w0.3: U3.113@51.65,45.85 55.364,45.85 56.5,46.986 56.5,47.993 60.15,51.643 60.15,52.852 68.677,61.379 69.179,61.379 v2(69.3,61.5)
MCU_LED8: R2H.2 U3.119 | length 42.5
  Top Layer w1: v2(84.1,62) 84.112,62 85.012,62.9 R2H.2@85.3,62.9
  Bottom Layer w0.3: U3.119@51.65,42.85 54.8,42.85 56.607,42.85 59.5,45.743 59.5,46.702 62.048,49.25 69.05,49.25 80.85,61.05 83.15,61.05 v2(84.1,62)
MCU_LOCK1: R4A.1 U3.27 | length 28.6
  Top Layer w0.3: R4A.1@17.1,22.3 17.3,22.1 v1(27.9,22.1)
  Bottom Layer w0.3: v1(27.9,22.1) 27.9,21.911 28.172,21.639 28.172,21.628 30.65,19.15 34.75,19.15 36.35,20.75 U3.27@36.35,28.05
MCU_LOCK2: R4B.1 U3.36 | length 29.5
  Top Layer w0.3: R4B.1@17.1,38.3 17.1,38.025 18.1,37.025 18.1,27.1 20.9,24.3 v1(30.5,24.3)
  Bottom Layer w0.3: v1(30.5,24.3) 31.85,25.65 U3.36@31.85,28.05
MCU_LOCK3: R4C.1 U3.44 | length 40.8
  Top Layer w1: R4C.1@17.1,54.3 v1(18.5,54.3)
  Bottom Layer w0.3: v1(18.5,54.3) 18.5,54.111 18,53.611 18,29.591 18,29.107 18.607,28.5 20.921,28.5 26.271,33.85 U3.44@29.55,33.85
MCU_LOCK4: R4D.1 U3.74 | length 21.3
  Top Layer w0.3: R4D.1@18.8,62.9 19.075,62.9 21.381,60.594 21.381,58.13 21.381,57.812 24.193,55 v1(27,55)
  Bottom Layer w0.3: v1(27,55) 28.4,53.6 29.8,53.6 31.5,51.9 32.057,51.9 32.35,51.607 U3.74@32.35,50.15
MCU_LOCK5: R4E.1 U3.80 | length 14.8
  Top Layer w1: v1(34.1,61.9) 34.234,62.034 34.234,62.534 34.6,62.9 R4E.1@34.8,62.9
  Bottom Layer w0.3: v1(34.1,61.9) 32.775,60.575 32.775,55.425 35.35,52.85 U3.80@35.35,50.15
MCU_LOCK6: R4F.1 U3.87 | length 26.4
  Top Layer w1: v2(49.7,62) 49.7,62.037 50.563,62.9 R4F.1@50.8,62.9
  Bottom Layer w0.3: U3.87@38.85,50.15 38.85,54.522 37.55,55.822 37.55,56.541 36.65,57.441 36.65,59.559 39.091,62 39.691,62.6 48.956,62.6 49.556,62 v2(49.7,62)
MCU_LOCK7: R4G.1 U3.112 | length 24.9
  Top Layer w1: v2(66.8,61.5) R4G.1@66.8,62.9
  Bottom Layer w0.3: U3.112@51.65,46.35 55.157,46.35 56,47.193 56,48.2 59.65,51.85 59.65,53.059 66.8,60.209 v2(66.8,61.5)
MCU_LOCK8: R4H.1 U3.118 | length 39.9
  Top Layer w1: v2(81.6,61.9) 81.6,61.937 82.563,62.9 R4H.1@82.8,62.9
  Bottom Layer w0.3: U3.118@51.65,43.35 54.593,43.35 56.4,43.35 59,45.95 59,46.957 61.793,49.75 68.843,49.75 80.859,61.766 81.466,61.766 v2(81.6,61.9)
MCU_MAGNET1: C2A.1 R6A.2 R7A.2 U3.21 ZD1A.2 | length 50.5
  Top Layer w0.3: R7A.2@11.55,14.6 R7A.2@11.575,14.625 ; R6A.2@11.575,17.173 R6A.2@11.6,17.198 R6A.2@11.602,17.2 ; C2A.1@15.15,14.6 15.15,14.264 15.525,13.889 15.525,13.85 15.925,13.45 17.616,13.45 18.965,14.799 18.965,17.565 19.55,18.15 25.25,18.15 v2(26.3,17.1)
  Top Layer w1: R7A.2@11.55,14.6 C2A.1@15.15,14.6 ; R7A.2@11.575,14.625 R6A.2@11.575,17.173 ; R6A.2@11.602,17.2 ZD1A.2@13.7,17.2
  Bottom Layer w0.3: v2(26.3,17.1) 26.3,17.056 28.656,14.7 36.7,14.7 39.95,17.95 39.95,24.05 39.35,24.65 U3.21@39.35,28.05
MCU_MAGNET2: C2B.1 R6B.2 R7B.2 U3.35 ZD1B.2 | length 35
  Top Layer w0.3: v1(19,23.9) 19.126,23.9 19.526,23.5 29.974,23.5 30.474,23 v1(30.5,23)
  Top Layer w1: ZD1B.2@13.7,33.2 11.602,33.2 R6B.2@11.6,33.198 11.575,33.173 11.575,30.625 R7B.2@11.55,30.6 v2(13.35,30.6) C2B.1@15.15,30.6
  Bottom Layer w0.3: v2(13.35,30.6) 19,24.95 v1(19,23.9) ; v1(30.5,23) 32.35,24.85 U3.35@32.35,28.05
MCU_MAGNET3: C2C.1 R6C.2 R7C.2 U3.43 ZD1C.2 | length 42.4
  Top Layer w1: ZD1C.2@13.7,49.2 11.602,49.2 R6C.2@11.6,49.198 11.575,49.173 11.575,46.625 R7C.2@11.55,46.6 v2(13.35,46.6) C2C.1@15.15,46.6
  Bottom Layer w0.3: v2(13.35,46.6) 13.35,33.05 18.4,28 21.128,28 26.478,33.35 U3.43@29.55,33.35
MCU_MAGNET4: C2D.1 R6D.2 R7D.2 U3.73 ZD1D.2 | length 35.9
  Top Layer w1: C2D.1@11.1,64.85 v2(11.1,66.65) R7D.2@11.1,68.45 11.125,68.425 13.674,68.425 R6D.2@13.698,68.4 13.7,68.398 ZD1D.2@13.7,66.3
  Bottom Layer w0.3: v2(11.1,66.65) 13.35,66.65 25,55 25.788,54.212 25.788,54.21 29.848,50.15 U3.73@31.85,50.15
MCU_MAGNET5: C2E.1 R6E.2 R7E.2 U3.76 ZD1E.2 | length 28.1
  Top Layer w1: C2E.1@27.1,64.85 v2(27.1,66.65) R7E.2@27.1,68.45 27.125,68.425 29.674,68.425 R6E.2@29.699,68.4 29.7,68.398 ZD1E.2@29.7,66.3
  Bottom Layer w0.3: v2(27.1,66.65) 27.1,59 29.05,57.05 29.05,55.182 29.632,54.6 30.284,54.6 31.834,53.05 32.321,53.05 33.35,52.021 U3.76@33.35,50.15
MCU_MAGNET6: C2F.1 R6F.2 R7F.2 U3.82 ZD1F.2 | length 29.5
  Top Layer w1: C2F.1@43.1,64.85 v2(43.1,66.65) R7F.2@43.1,68.45 43.125,68.425 45.674,68.425 R6F.2@45.698,68.4 R6F.2@45.698,68.4 ZD1F.2@45.7,66.3
  Bottom Layer w0.3: U3.82@36.35,50.15 36.35,53.264 34.15,55.464 34.15,56.348 35.05,57.248 35.05,57.352 35.05,58.75 42.95,66.65 v2(43.1,66.65)
MCU_MAGNET7: C2G.1 R6G.2 R7G.2 U3.110 ZD1G.2 | length 32.6
  Top Layer w1: C2G.1@59.1,64.85 v2(59.1,66.65) R7G.2@59.1,68.45 59.125,68.425 61.673,68.425 R6G.2@61.698,68.4 R6G.2@61.698,68.4 ZD1G.2@61.7,66.3
  Bottom Layer w0.3: U3.110@51.65,47.35 54.674,47.35 54.85,47.526 54.85,51.952 54.65,52.152 54.65,53.625 59.1,58.075 v2(59.1,66.65)
MCU_MAGNET8: C2H.1 R6H.2 R7H.2 U3.116 ZD1H.2 | length 44
  Top Layer w1: C2H.1@75.1,64.85 v2(75.1,66.65) R7H.2@75.1,68.45 75.125,68.425 77.673,68.425 R6H.2@77.698,68.4 77.7,68.398 ZD1H.2@77.7,66.3
  Bottom Layer w0.3: U3.116@51.65,44.35 54.179,44.35 55.986,44.35 58,46.364 58,47.372 62.128,51.5 64,51.5 67.45,54.95 67.45,58.125 75.1,65.775 v2(75.1,66.65)
MCU_NRST: C15.2 R46.1 S2.2 U3.25 | length 28.8
  Top Layer w0.5: R46.1@24.25,19.525 C15.2@26.125,19.525 26.125,19.25 27.379,17.996 27.904,17.996 v1(28,17.9) 27.904,17.804 27.904,15.754 S2.2@27.675,15.525
  Bottom Layer w0.3: v1(28,17.9) 29.998,15.902 30.2,15.7 35.602,15.7 36.35,16.448 36.35,17.45 36.15,17.65 36.15,18.852 37.35,20.052 37.35,23.822 ; 37.35,23.822 U3.25@37.35,28.05
MCU_OCS_N: C16.2 U3.23 Y1.1 | length 15.8
  Top Layer w0.3: v1(38.5,18.5) 38.575,18.575 39.664,18.575 C16.2@40.4,19.311 ; Y1.1@40.4,15.525 C16.2@40.4,19.311 ; C16.2@40.4,19.525 C16.2@40.4,19.311
  Bottom Layer w0.3: U3.23@38.35,28.05 38.35,19.026 38.366,19.01 38.366,18.634 v1(38.5,18.5)
MCU_OCS_P: C17.2 U3.24 Y1.2 | length 19.4
  Top Layer w0.3: Y1.2@31.9,15.525 31.9,19.311 C17.2@31.9,19.525 32.95,19.525 33.975,18.5 v1(37,18.5)
  Bottom Layer w0.3: v1(37,18.5) 37.85,19.35 U3.24@37.85,28.05
MCU_RXD: CN4.4 U3.102 | length 57.8
  Top Layer w0.3: v2(48.5,56.7) 49.3,57.5 52.393,57.5 53.343,56.55 75.45,56.55 v1(77.5,54.5)
  Bottom Layer w0.3: U3.102@46.35,50.15 46.35,53.448 48.5,55.598 v2(48.5,56.7)
  Bottom Layer w1: v1(77.5,54.5) 77.5,54.597 82.803,59.9 CN4.4@95,59.9
MCU_SCL: R8.2 U1.6 U3.100 | length 40.8
  Top Layer w0.3: U1.6@24.9,58.16 24.934,58.126 25.974,58.126 26.6,57.5 28.5,57.5 28.758,57.758 28.758,59.231 29.128,59.6 31.45,59.6 32.325,58.725 R8.2@32.6,58.725 32.875,58.725 33.95,59.8 36.422,59.8 38.522,61.9 47.925,61.9 49.07,60.755 49.07,59.07 48.6,58.6 48,58.6 v2(47,57.6)
  Bottom Layer w0.3: U3.100@45.35,50.15 45.35,55.055 46.945,56.65 46.945,57.545 v2(47,57.6)
MCU_SDA: R9.2 U1.5 U3.99 | length 34.5
  Top Layer w0.3: U1.5@24.9,56.89 29.19,56.89 30.097,57.797 R9.2@30.097,58.725 30.372,58.725 32.372,56.725 34.623,56.725 35.05,57.152 35.05,57.352 35.548,57.85 35.886,57.85 38.936,60.9 43.302,60.9 43.95,60.252 43.95,57.657 44.973,56.634 45.366,56.634 v2(45.5,56.5)
  Bottom Layer w0.3: U3.99@44.85,50.15 44.85,55.806 45.5,56.456 v2(45.5,56.5)
MCU_SWCLK: H1.3 U3.109 | length 16.5
  Bottom Layer w0.3: H1.3@50.36,59.9 51.61,58.65 53.675,58.65 54.9,57.425 54.9,55.2 51.65,51.95 U3.109@51.65,47.85
MCU_SWDIO: H1.1 U3.105 | length 16.6
  Bottom Layer w0.3: H1.1@45.28,59.9 46.68,58.5 50.902,58.5 51.85,57.552 51.85,56.05 47.85,52.05 U3.105@47.85,50.15
MCU_TXD: CN4.5 U3.101 | length 58
  Top Layer w0.3: v1(47.5,55.8) 47.5,56.898 47.85,57.248 47.85,57.252 48.598,58 52.8,58 53.75,57.05 76.55,57.05 v1(79.1,54.5)
  Bottom Layer w0.3: U3.101@45.85,50.15 45.85,54.05 47.5,55.7 v1(47.5,55.8)
  Bottom Layer w1: v1(79.1,54.5) 81.325,54.5 84.225,57.4 CN4.5@95,57.4
MCU_VBAT: BAT1.1 C38.2 C39.2 D2.2 U3.6 | length 37
  Top Layer w0.5: C39.2@46.85,28.025 46.9,27.975 v1(46.9,24.5) ; C38.2@58.225,24.125 59.4,24.125 ; v2(59.4,23.2) 59.4,24.125 ; D2.2@60.5,23.625 D2.2@60.5,23.638 ; BAT1.1@70.525,28.012 70.525,27.05 68.675,25.2 63.325,25.2 61.763,23.638 D2.2@60.5,23.638 ; 59.4,24.125 60.013,24.125 D2.2@60.5,23.638
  Mid-Top w0.3: v1(46.9,24.5) 47.841,23.559 49.152,23.559 50.343,24.75 50.852,24.75 52.145,24.75 53.695,23.2 v2(59.4,23.2)
  Bottom Layer w0.3: U3.6@46.85,28.05 46.85,24.55 v1(46.9,24.5)
NetC4_1: C4.1 R11.2 R12.1 | length 4.4
  Top Layer w0.5: R12.1@73.175,8.575 R11.2@75.175,8.575 C4.1@75.175,6.15
NetC5_1: C5.1 MIC1.1 R12.2 | length 9.4
  Top Layer w0.5: MIC1.1@64.6,5.4 64.868,5.4 65.618,6.15 C5.1@71.225,6.15 R12.2@71.225,8.575
NetC6_1: C6.1 MIC1.2 R14.1 | length 9.1
  Top Layer w0.5: MIC1.2@64.6,3.5 71,3.5 C6.1@71.225,3.725 R14.1@71.225,1.3
NetC7_1: C7.1 U2.18 | length 3.6
  Top Layer w0.5: U2.18@83.4,21.9 83.4,24.142 84.183,24.925 C7.1@84.425,24.925
NetC40_1: C40.1 SC2.1 | length 6
  Bottom Layer w2: C40.1@4.8,68.7 SC2.1@4.8,74.7
NetCN1A_2: CN1A.2 R7A.1 | length 6.4
  Top Layer w0.5: CN1A.2@5,18.5 5.287,18.213 6.262,18.213 9.6,14.875 R7A.1@9.6,14.6
NetCN1A_4: CN1A.4 D1A.1 Q2A.3 | length 10.5
  Top Layer w1: CN1A.4@5,23.5 10.8,23.5 Q2A.3@11.2,23.1 11.2,21.806 12.606,20.4 12.659,20.4 13.1,19.959 D1A.1@13.1,19.8
NetCN1A_5: CN1A.5 Q1A.3 | length 6.5
  Top Layer w1: CN1A.5@5,26 10.4,26 Q1A.3@11.2,26.8
NetCN1B_2: CN1B.2 R7B.1 | length 6.4
  Top Layer w0.5: CN1B.2@5,34.5 5.287,34.213 6.262,34.213 9.6,30.875 R7B.1@9.6,30.6
NetCN1B_4: CN1B.4 D1B.1 Q2B.3 | length 11
  Top Layer w1: CN1B.4@5,39.5 10.8,39.5 Q2B.3@11.2,39.1 11.2,36.9 11.985,36.115 12.95,36.115 13.1,35.965 D1B.1@13.1,35.8
NetCN1B_5: CN1B.5 Q1B.3 | length 6.5
  Top Layer w1: CN1B.5@5,42 10.4,42 Q1B.3@11.2,42.8
NetCN1C_2: CN1C.2 R7C.1 | length 6.4
  Top Layer w0.5: CN1C.2@5,50.5 5.287,50.213 6.262,50.213 9.6,46.875 R7C.1@9.6,46.6
NetCN1C_4: CN1C.4 D1C.1 Q2C.3 | length 11.1
  Top Layer w1: CN1C.4@5,55.5 10.8,55.5 Q2C.3@11.2,55.1 11.2,52.675 11.872,52.003 12.95,52.003 13.1,51.853 D1C.1@13.1,51.8
NetCN1C_5: CN1C.5 Q1C.3 | length 6.5
  Top Layer w1: CN1C.5@5,58 10.4,58 Q1C.3@11.2,58.8
NetCN1D_2: CN1D.2 R7D.1 | length 6.4
  Top Layer w0.5: R7D.1@11.1,70.4 11.375,70.4 14.713,73.738 14.713,74.713 CN1D.2@15,75
NetCN1D_4: CN1D.4 D1D.1 Q2D.3 | length 10.5
  Top Layer w1: D1D.1@16.3,66.9 16.459,66.9 16.9,67.341 16.9,67.394 18.306,68.8 Q2D.3@19.6,68.8 20,69.2 CN1D.4@20,75
NetCN1D_5: CN1D.5 Q1D.3 | length 6.5
  Top Layer w1: CN1D.5@22.5,75 22.5,69.6 Q1D.3@23.3,68.8
NetCN1E_2: CN1E.2 R7E.1 | length 6.4
  Top Layer w0.5: R7E.1@27.1,70.4 27.375,70.4 30.713,73.738 30.713,74.713 CN1E.2@31,75
NetCN1E_4: CN1E.4 D1E.1 Q2E.3 | length 10.5
  Top Layer w1: D1E.1@32.3,66.9 32.459,66.9 32.9,67.341 32.9,67.394 34.306,68.8 Q2E.3@35.6,68.8 36,69.2 CN1E.4@36,75
NetCN1E_5: CN1E.5 Q1E.3 | length 6.5
  Top Layer w1: CN1E.5@38.5,75 38.5,69.6 Q1E.3@39.3,68.8
NetCN1F_2: CN1F.2 R7F.1 | length 6.4
  Top Layer w0.5: R7F.1@43.1,70.4 43.375,70.4 46.713,73.738 46.713,74.713 CN1F.2@47,75
NetCN1F_4: CN1F.4 D1F.1 Q2F.3 | length 10.5
  Top Layer w1: D1F.1@48.3,66.9 48.459,66.9 48.9,67.341 48.9,67.394 50.306,68.8 Q2F.3@51.6,68.8 52,69.2 CN1F.4@52,75
NetCN1F_5: CN1F.5 Q1F.3 | length 6.5
  Top Layer w1: CN1F.5@54.5,75 54.5,69.6 Q1F.3@55.3,68.8
NetCN1G_2: CN1G.2 R7G.1 | length 6.4
  Top Layer w0.5: R7G.1@59.1,70.4 59.375,70.4 62.713,73.738 62.713,74.713 CN1G.2@63,75
NetCN1G_4: CN1G.4 D1G.1 Q2G.3 | length 10.5
  Top Layer w1: D1G.1@64.3,66.9 64.459,66.9 64.9,67.341 64.9,67.394 66.306,68.8 Q2G.3@67.6,68.8 68,69.2 CN1G.4@68,75
NetCN1G_5: CN1G.5 Q1G.3 | length 6.5
  Top Layer w1: CN1G.5@70.5,75 70.5,69.6 Q1G.3@71.3,68.8
NetCN1H_2: CN1H.2 R7H.1 | length 6.4
  Top Layer w0.5: R7H.1@75.1,70.4 75.375,70.4 78.713,73.738 78.713,74.713 CN1H.2@79,75
NetCN1H_4: CN1H.4 D1H.1 Q2H.3 | length 10.5
  Top Layer w1: D1H.1@80.3,66.9 80.459,66.9 80.9,67.341 80.9,67.394 82.306,68.8 Q2H.3@83.6,68.8 84,69.2 CN1H.4@84,75
NetCN1H_5: CN1H.5 Q1H.3 | length 6.5
  Top Layer w1: CN1H.5@86.5,75 86.5,69.6 Q1H.3@87.3,68.8
NetCN3_6: CN3.6 TP1.1 | length 5.4
  Top Layer w0.3: v1(14,2.825) 15.124,2.825 16,3.701 CN3.6@16,5.2
  Bottom Layer w0.3: TP1.1@14,1.3 v1(14,2.825)
NetCN3_8: CN3.8 R15.1 | length 4.4
  Top Layer w0.3: R15.1@16.925,9.525 17,9.45 CN3.8@17,5.2
NetCN3_9: CN3.9 R16.2 | length 5.3
  Top Layer w0.3: CN3.9@17.5,5.2 17.5,7.95 19.075,9.525 R16.2@19.35,9.525
NetCN3_10: CN3.10 R17.2 | length 7
  Top Layer w0.3: CN3.10@18,5.2 18,7.707 18.943,8.65 19.978,8.65 20.141,8.65 20.711,9.22 21.469,9.22 R17.2@21.775,9.525
NetCN3_11: CN3.11 R18.2 | length 8.8
  Top Layer w0.3: CN3.11@18.5,5.2 18.5,7.5 19.15,8.15 20.348,8.15 20.848,8.65 22.709,8.65 22.859,8.8 22.9,8.8 23.319,9.219 23.894,9.219 R18.2@24.2,9.525
NetCN3_37: CN3.37 R43.2 | length 5.1
  Top Layer w0.3: R43.2@30.125,9.525 30.4,9.525 31.5,8.425 CN3.37@31.5,5.2
NetCN3_41: CN3.41 TP2.1 | length 5.7
  Top Layer w0.3: v1(31,2.7) 32.15,3.85 33.001,3.85 33.5,4.349 CN3.41@33.5,5.2
  Bottom Layer w0.3: TP2.1@29.85,1.475 29.85,1.512 31,2.662 v1(31,2.7)
NetCN3_42: CN3.42 TP3.1 | length 4.5
  Top Layer w0.3: v1(32.9,3) 32.9,3.002 34,4.102 CN3.42@34,5.2
  Bottom Layer w0.3: TP3.1@32.175,1.475 32.175,1.8 32.766,2.391 32.766,2.866 v1(32.9,3)
NetCN3_43: CN3.43 TP4.1 | length 3.7
  Top Layer w0.3: v1(34.5,3.4) CN3.43@34.5,5.2
  Bottom Layer w0.3: TP4.1@34.5,1.475 v1(34.5,3.4)
NetCN3_44: CN3.44 R45.2 | length 5.5
  Top Layer w0.3: R45.2@32.55,9.525 32.764,9.525 33.131,9.159 33.131,8.769 35,6.9 CN3.44@35,5.2
NetCN3_45: CN3.45 TP5.1 | length 4.3
  Top Layer w0.3: CN3.45@35.5,5.2 35.5,3.6 v1(36.1,3)
  Bottom Layer w0.3: v1(36.1,3) 36.234,2.866 36.234,2.391 36.825,1.8 TP5.1@36.825,1.475
NetCN3_46: CN3.46 TP6.1 | length 6.2
  Top Layer w0.3: CN3.46@36,5.2 36,4.349 36.849,3.5 v1(38.8,3.5)
  Bottom Layer w0.3: v1(38.8,3.5) 38.8,3.311 39.15,2.961 TP6.1@39.15,1.475
NetD2_1: D2.1 R50.1 | length 2.9
  Top Layer w0.5: D2.1@63.9,23.625 63.9,23.561 64.387,23.075 65,23.075 65.9,22.175 R50.1@66.175,22.175
NetFB5_2: FB5.2 R50.2 | length 2.5
  Top Layer w0.5: R50.2@66.175,24.125 FB5.2@68.675,24.125
NetH2_1: H2.1 R48.2 | length 2.6
  Top Layer w0.5: R48.2@61.2,28.3 H2.1@61.2,30.86
NetH3_3: H3.3 R47.2 | length 2.5
  Top Layer w1: H3.3@20.15,38.39 R47.2@20.15,40.9
NetLED1_2: LED1.2 R10.1 | length 1.9
  Top Layer w0.5: LED1.2@59.85,4.625 R10.1@59.85,6.55
NetLED2_1: LED2.1 R49.2 | length 4.5
  Top Layer w0.5: LED2.1@55.802,57.9 56.126,57.9 58.901,60.675 R49.2@59.2,60.675
NetLED3_1: LED3.1 U3.5 | length 13.6
  Top Layer w0.5: v2(52.3,23.1) 52.3,22.879 53.054,22.125 LED3.1@53.3,22.125
  Bottom Layer w0.3: U3.5@47.35,28.05 47.35,29.507 47.643,29.8 50.275,29.8 52.3,27.775 v2(52.3,23.1)
NetLED3_2: LED3.2 R51.1 | length 2.8
  Top Layer w0.5: LED3.2@53.3,24.925 53.6,24.925 54.4,24.125 R51.1@55.8,24.125
NetLED4_2: LED4.2 R52.1 | length 2.8
  Top Layer w1: R52.1@80.3,58.7 80.325,58.675 80.675,58.675 81.45,57.9 LED4.2@82.798,57.9
NetQ1A_2: Q1A.2 R2A.1 R3A.1 | length 4.5
  Top Layer w1: Q1A.2@13.2,25.8 15.15,25.8 ; R2A.1@15.15,24.8 15.15,25.8 ; R3A.1@15.15,27.3 15.15,25.8
NetQ1B_2: Q1B.2 R2B.1 R3B.1 | length 4.5
  Top Layer w1: Q1B.2@13.2,41.8 15.15,41.8 ; R2B.1@15.15,40.8 15.15,41.8 ; R3B.1@15.15,43.3 15.15,41.8
NetQ1C_2: Q1C.2 R2C.1 R3C.1 | length 4.5
  Top Layer w1: Q1C.2@13.2,57.8 15.15,57.8 ; R2C.1@15.15,56.8 15.15,57.8 ; R3C.1@15.15,59.3 15.15,57.8